# Altium PCB PCB1.PcbDoc
Units mm, origin at the board's own origin, x right, y up, seen from the top; angles counter-clockwise.
Board outline 42.5 x 36 mm, 4 copper layers (Top Layer, Int1 (GND), Int2 (PWR), Bottom Layer), stack 1.333 mm thick; 37 components, 21 nets, 116 pads, 31 vias.
Unrouted connection lines stored in the file: 32.
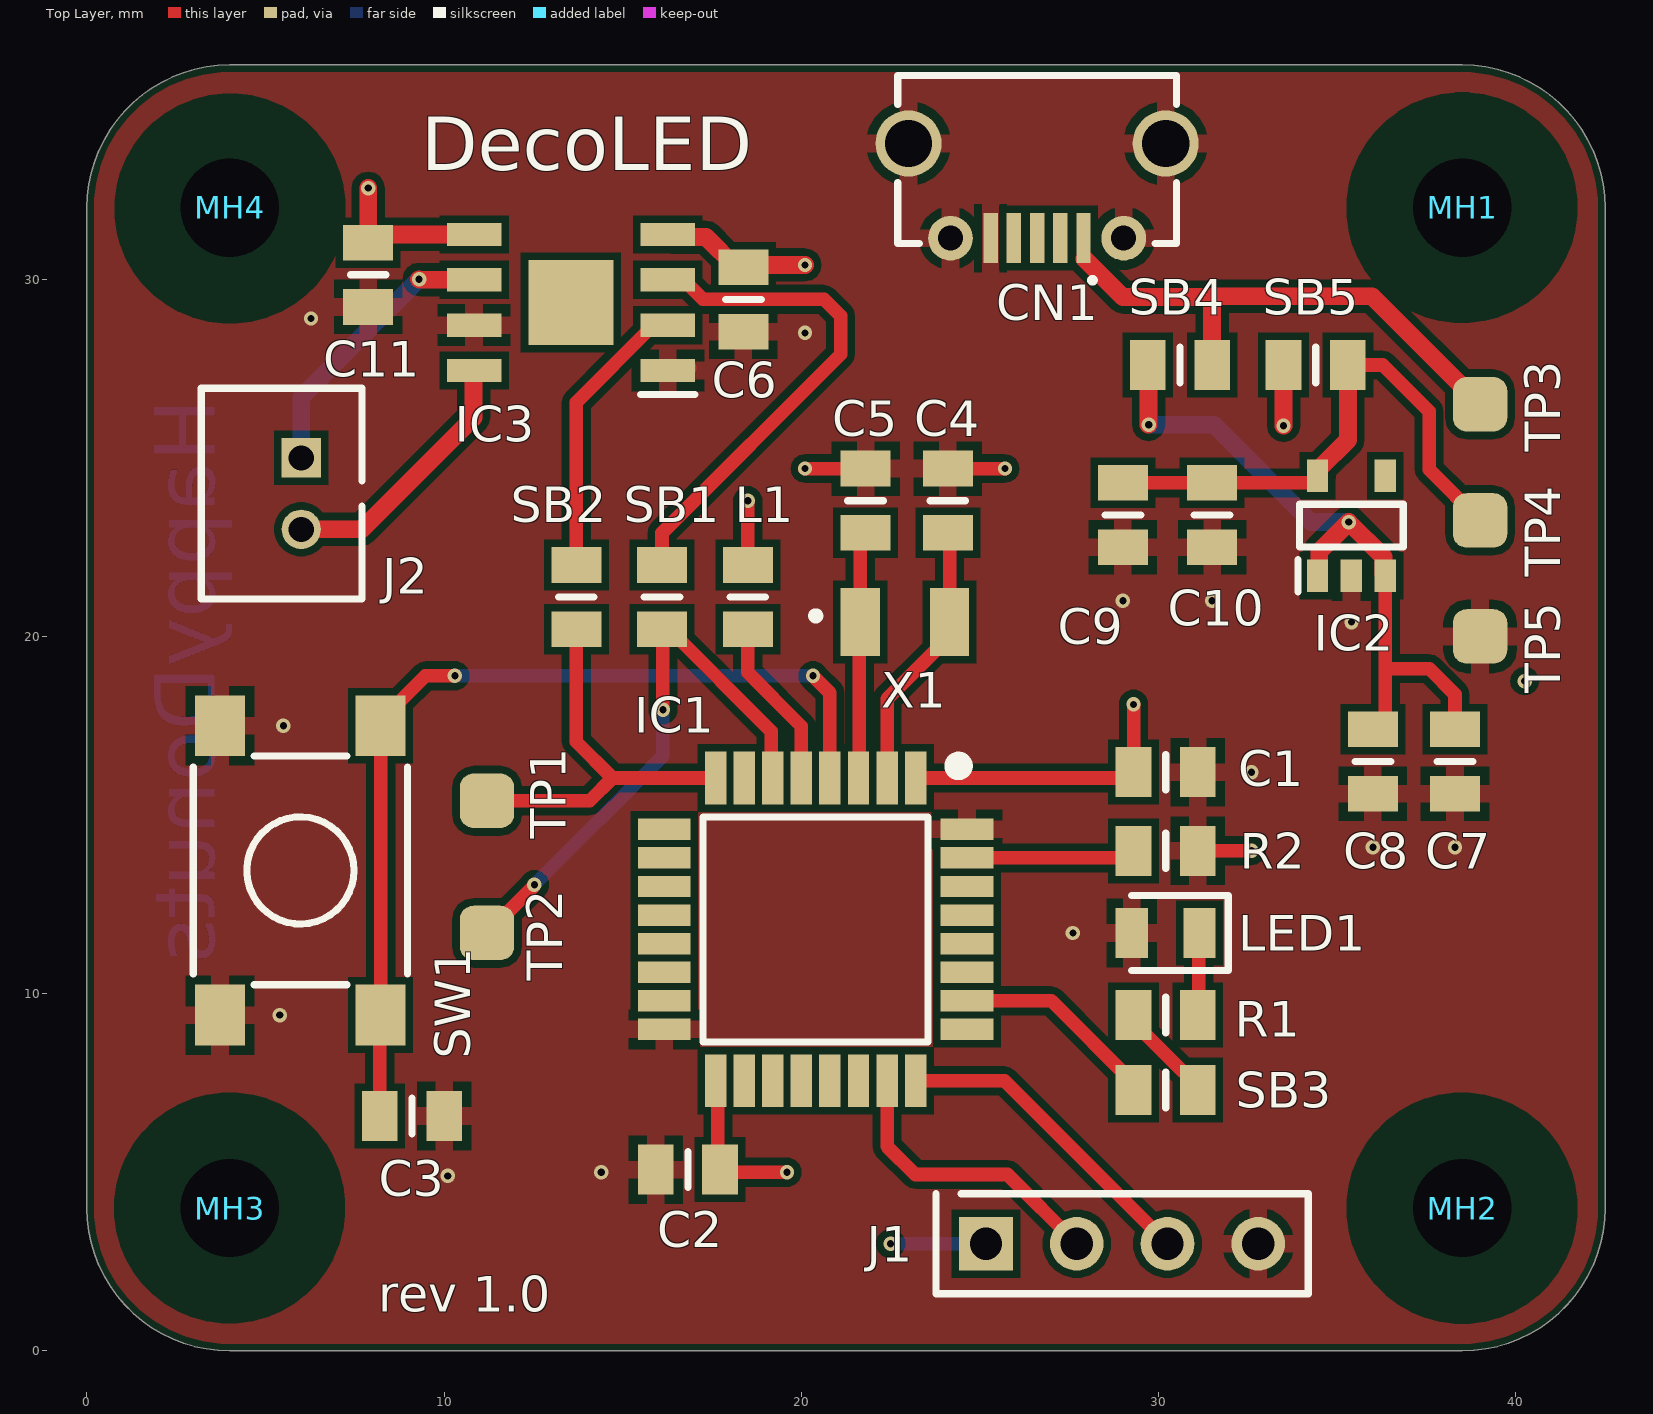
[diagram p0: Top Layer view]
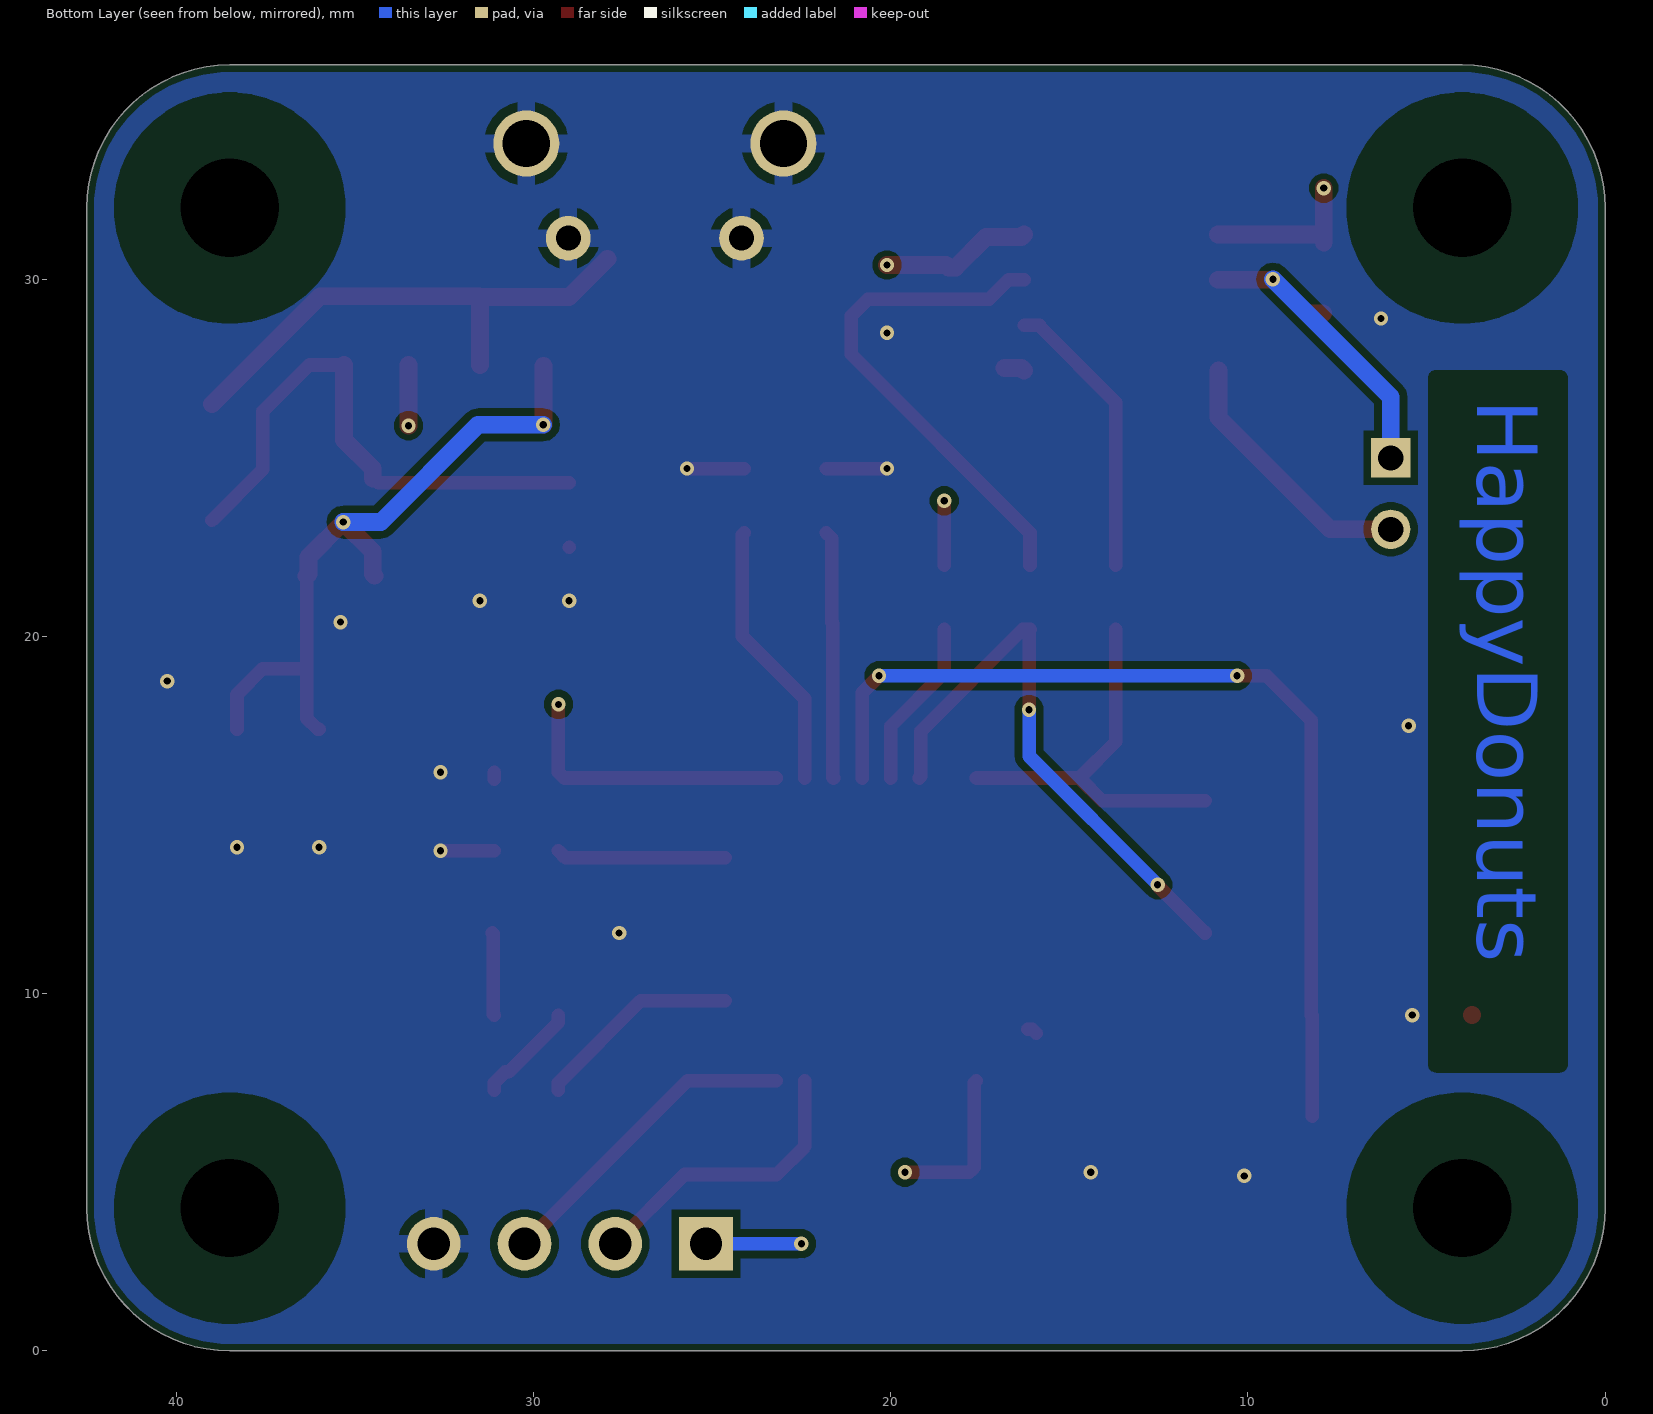
[diagram p1: Bottom Layer view, seen from below]
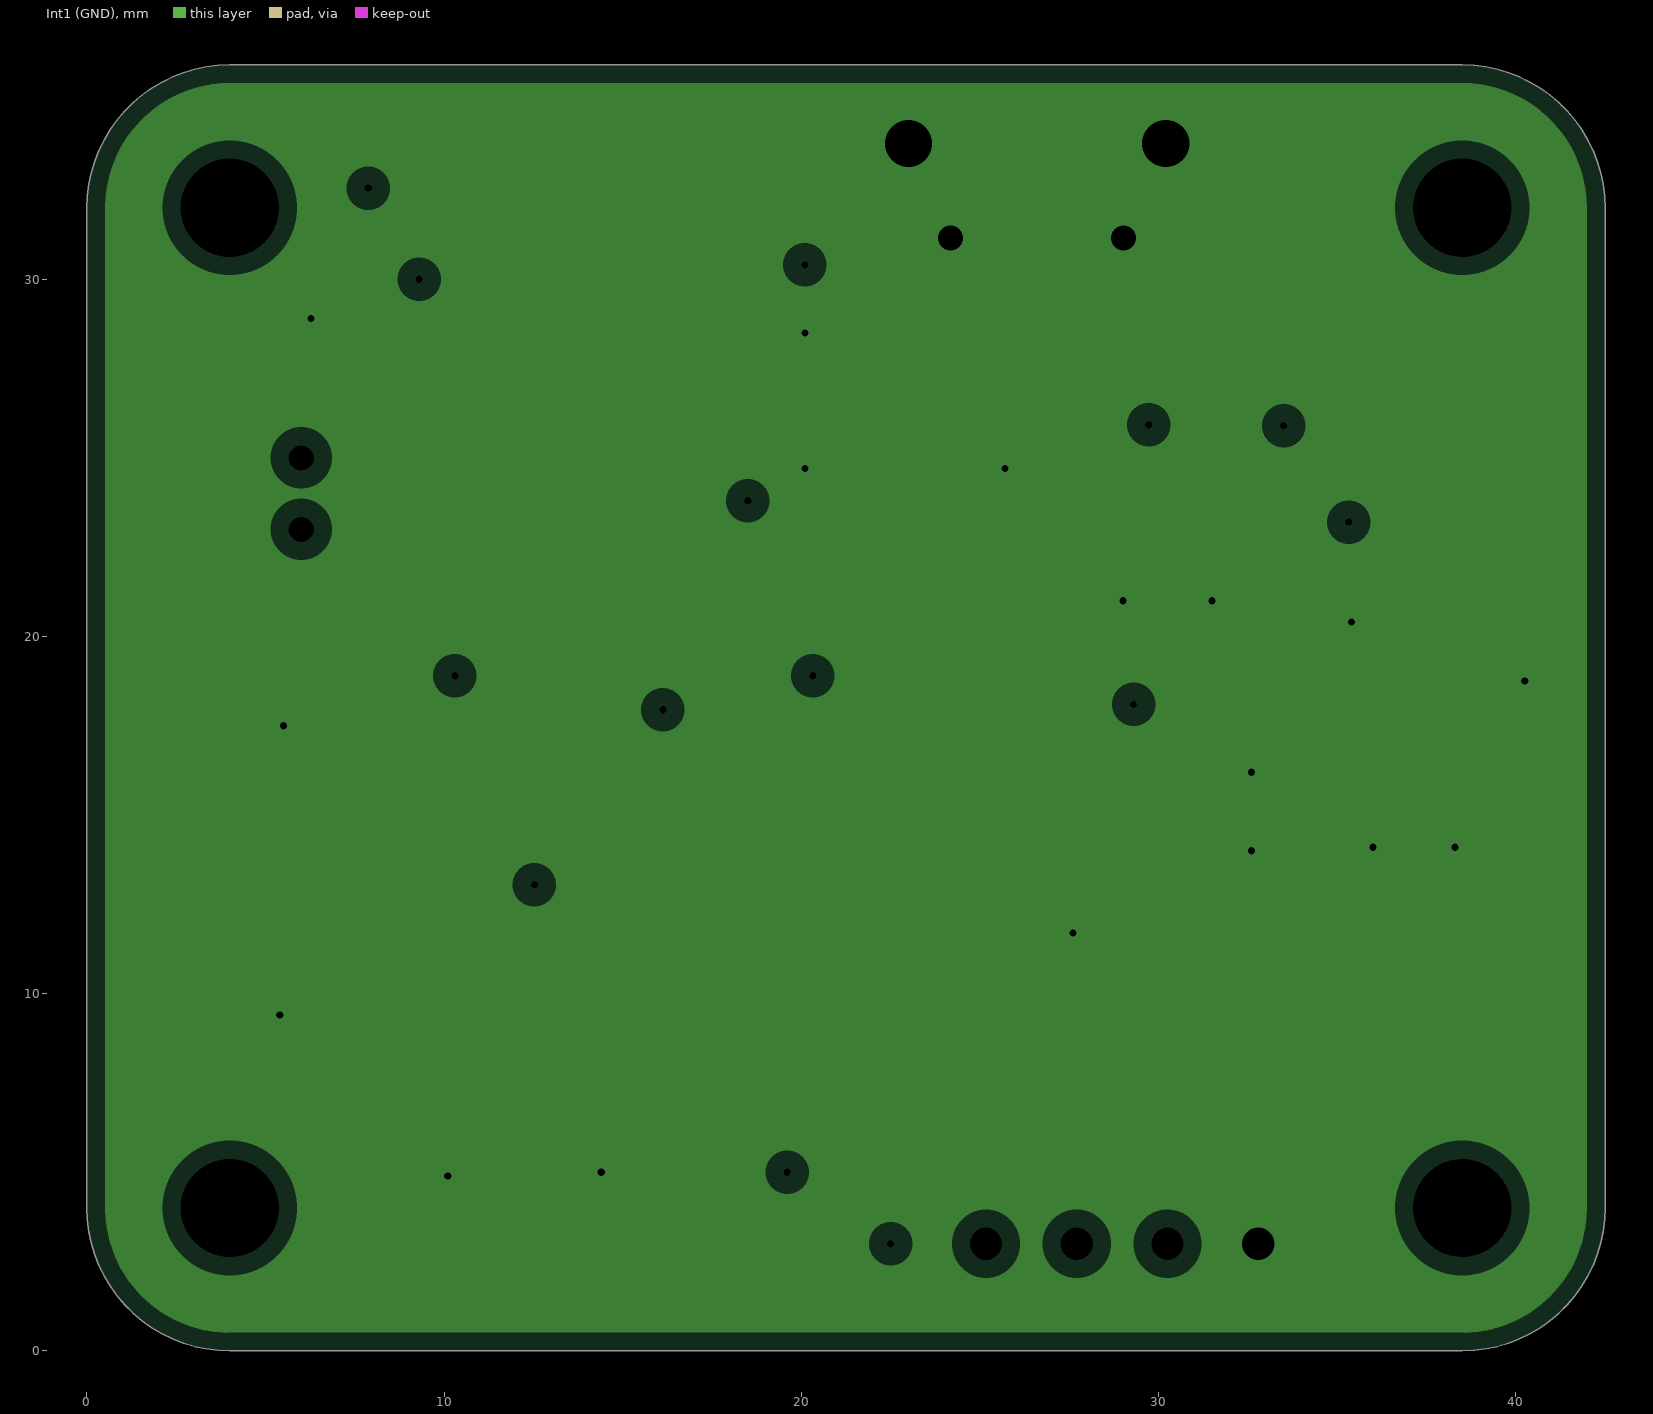
[diagram p2: Int1 (GND), clearances drawn from the general rule]
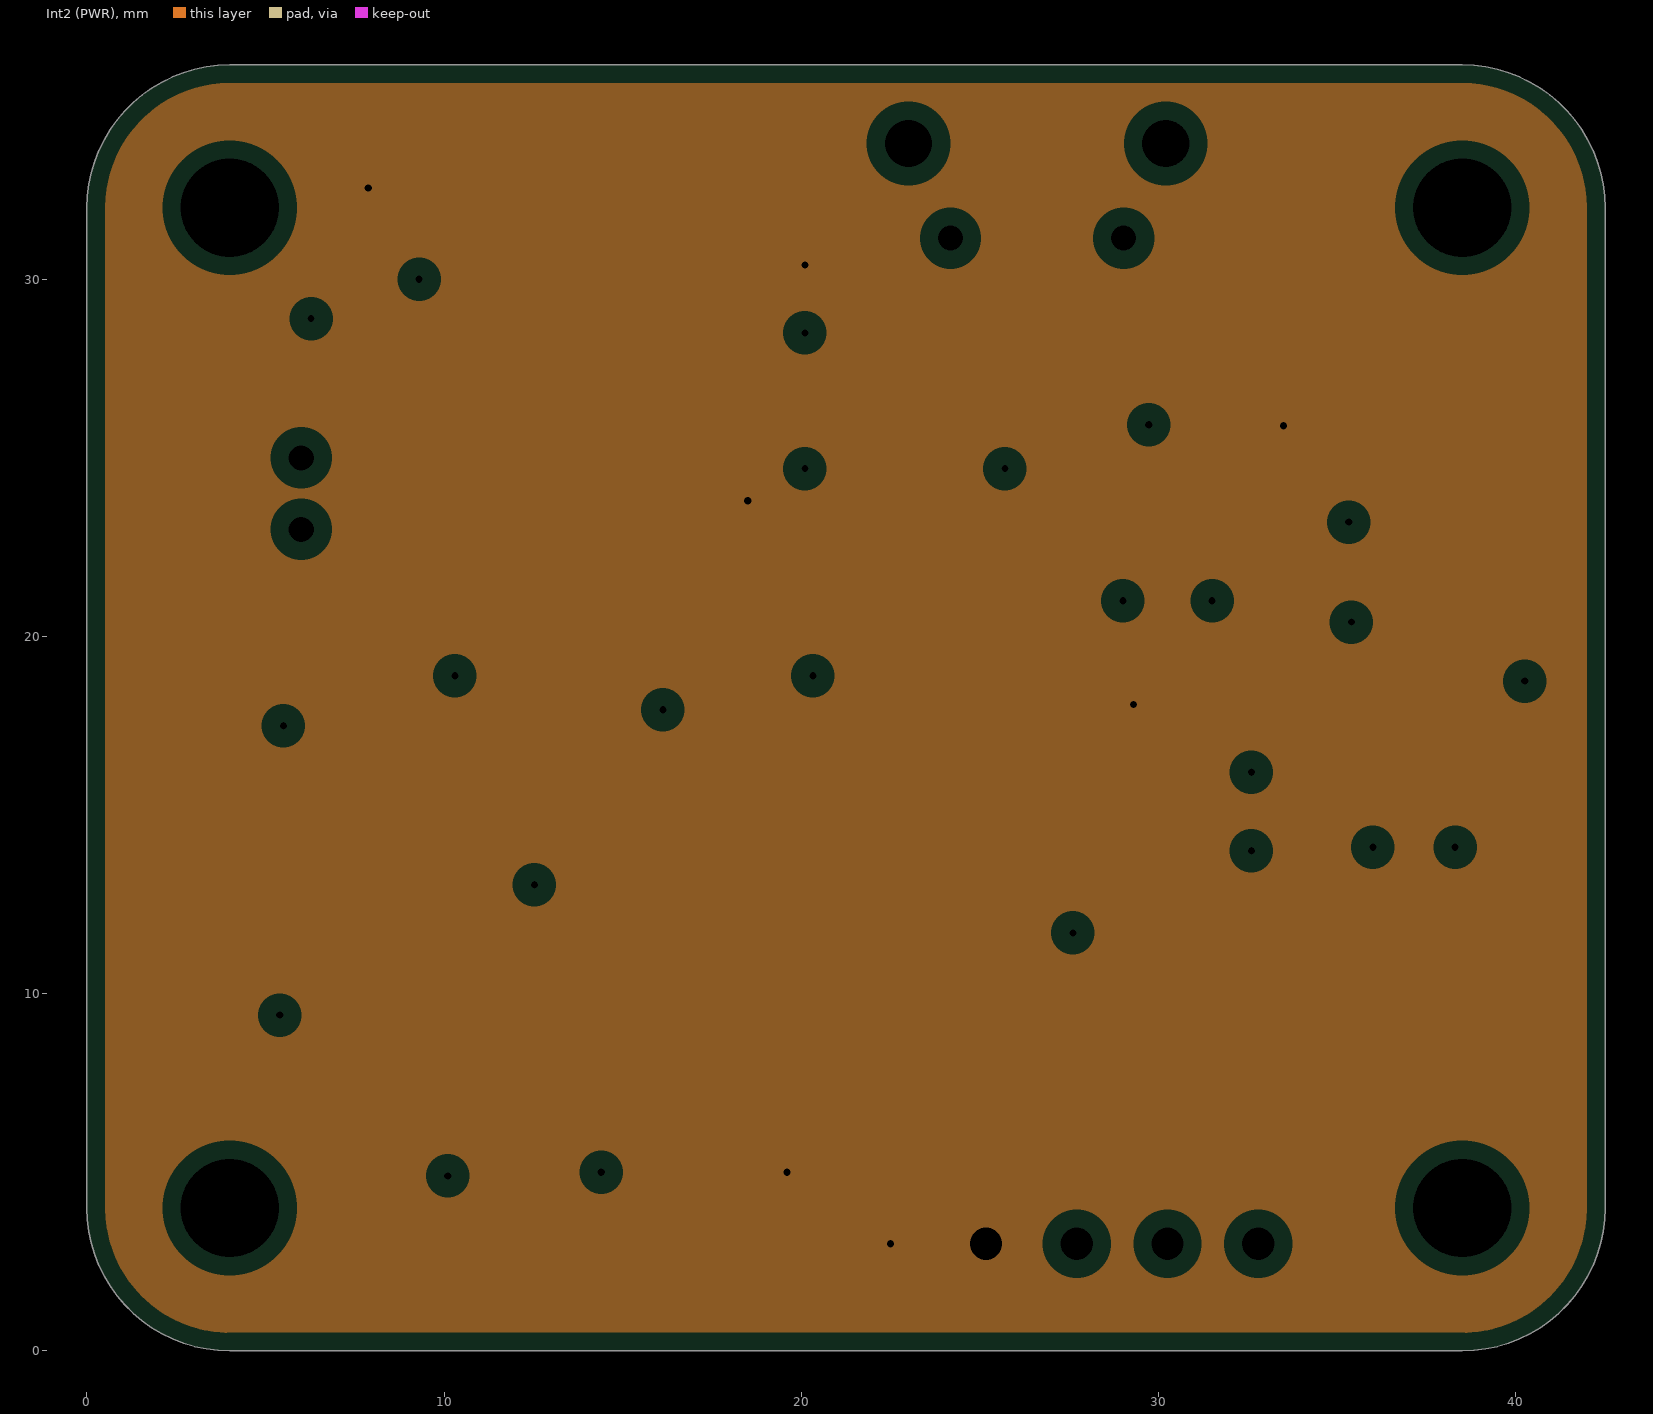
[diagram p3: Int2 (PWR), clearances drawn from the general rule]

## Layer stack, top to bottom
Top Solder: solder mask 0.0254, SM-001, Dk 4
Top Layer: signal copper 0.035
Dielectric 1: prepreg 0.1295, PP-017, Dk 4.3
Dielectric 2: prepreg 0.1295, PP-017, Dk 4.3
Int1 (GND): plane copper 0.017, net GND
Dielectric 3: core 0.7112, Core-039, Dk 4.8
Int2 (PWR): plane copper 0.017, net 3V3
Dielectric 4: prepreg 0.1295, PP-017, Dk 4.3
Dielectric 5: prepreg 0.1295, PP-017, Dk 4.3
Bottom Layer: signal copper 0.035
Bottom Solder: solder mask 0.0254, SM-001, Dk 4

## Board outline
4,0 cw(c4,4) 0,4 0,32 cw(c4,32) 4,36 38.5,36 cw(c38.5,32) 42.5,32 42.5,4 cw(c38.5,4) 38.5,0

## Design rules (kind name [scope] priority, off if disabled: settings)
BoardOutlineClearance [All] p1: gap=0.2 ignorepadtopadclearanceinfootprint=FALSE except(0.4: Arc-SplitBarrior Arc-SplitContinuation Track-SplitBarrior Track-SplitContinuation SMDPad-SplitBarrior SMDPad-SplitContinuation THPad-SplitBarrior THPad-SplitContinuation Via-SplitBarrior Via-SplitContinuation Fill-SplitBarrior Fill-SplitContinuation Poly-SplitBarrior Poly-SplitContinuation Region-SplitBarrior Region-SplitContinuation Text-SplitBarrior Text-SplitContinuation)
Clearance "Clearance Bottom Layer" [OnLayer('Bottom Layer')] p1: gap=0.203 ignorepadtopadclearanceinfootprint=TRUE except(0.254: Arc-Text Track-Text SMDPad-Text THPad-Text Via-Text Fill-Text Poly-Text Region-Text Text-Text)
Clearance "Clearance Top Layer" [OnLayer('Top Layer')] p2: gap=0.203 ignorepadtopadclearanceinfootprint=TRUE except(0.254: Arc-Text Track-Text SMDPad-Text THPad-Text Via-Text Fill-Text Poly-Text Region-Text Text-Text)
Clearance [All] p3: gap=0.2 ignorepadtopadclearanceinfootprint=FALSE except(0.089: Arc-Arc Arc-Track Arc-SMDPad Track-Track Track-SMDPad SMDPad-SMDPad; 0.127: Arc-Via Track-Via SMDPad-Via THPad-Via Via-Via; 0.254: Arc-Text Track-Text SMDPad-Text THPad-Text Via-Text Fill-Text Poly-Text Region-Text Text-Text)
HoleSize [All] p1: absolutevalues=TRUE maxlimit=6.3 minlimit=0.2 maxpercent=80.000 minpercent=20.000
MinimumAnnularRing [All] p1: minimumring=0.076
MinimumSolderMaskSliver [All] p1: minsoldermaskwidth=0.1
PlaneClearance [All] p1: clearance=0.508
PlaneConnect [All] p1: planeconnectstyle=Direct reliefexpansion=0.508 reliefentries=4 reliefconductorwidth=0.254 reliefairgap=0.254
PolygonConnect PolygonConnect_1 [All] p1: thpad.connectstyle=Relief thpad.reliefconductorwidth=0.508 thpad.reliefentries=4 thpad.polygonreliefangle="90 Angle" thpad.airgapwidth=0.254 smdpad.connectstyle=Relief smdpad.reliefconductorwidth=0.508 smdpad.reliefentries=4 smdpad.polygonreliefangle="90 Angle" smdpad.airgapwidth=0.254 via.connectstyle=Direct via.reliefconductorwidth=0.508 via.reliefentries=4 via.polygonreliefangle="90 Angle" via.airgapwidth=0.254
RoutingCorners [All] p1: cornerstyle=Round minsetback=2.54 maxsetback=2.54
RoutingVias [All] p1: holewidth=0.2 width=0.4 viastyle="Through Hole" minholewidth=0.2 minwidth=0.4 maxholewidth=0.2 maxwidth=2
SilkToSilkClearance [All] p1: silktosilkclearance=0.1
SilkToSolderMaskClearance [IsPad] p1: minsilkscreentomaskgap=0.1 clearancetoexposedcopper=TRUE
SolderMaskExpansion [All] p1: expansion=0.102 istentingtop=FALSE
Width [All] p1: maxlimit=2.54 minlimit=0.089 preferedwidth=0.381
23 further rules are at their usual default settings.

## Classes and differential pairs
component class main: C1 C2 C3 C4 C5 C6 C7 C8 C9 C10 C11 CN1 IC1 IC2 IC3 J1 J2 L1 LED1 MH1 MH2 R1 R2 SB1 SB2 SB3 SB4 SB5 SW1 TP1 TP2 TP3 TP4 TP5 X1

## Components (designator, comment, footprint, x,y, rotation, side; value= is the part's Value field where it differs from the comment)
C1 "C0805C104K5RAC7411" CAPC2012X94N 30.2,16.2 r180 top value=100nF
C2 "C0805C104K5RAC7411" CAPC2012X94N 16.825,5.075 r0 top value=100nF
C3 "C0805C104K5RAC7411" CAPC2012X94N 9.1,6.575 r0 top value=100nF
C4 "08055A4R3CAT2A" CAPC2012X94N 24.1,23.8 r270 top value=4.3pF
C5 "08055A4R3CAT2A" CAPC2012X94N 21.8,23.8 r270 top value=4.3pF
C6 "C0805C104K5RAC7411" CAPC2012X94N 18.377,29.434 r90 top value=100nF
C7 "C0805C104K5RAC7411" CAPC2012X94N 38.3,16.5 r90 top value=100nF
C8 "885012107015" CAPC2012X135N 36,16.5 r90 top value=1uF
C9 "885012107015" CAPC2012X135N 29,23.4 r90 top value=1uF
C10 "C0805C104K5RAC7411" CAPC2012X94N 31.5,23.4 r90 top value=100nF
C11 "C0805C104K5RAC7411" CAPC2012X94N 7.875,30.125 r90 top value=100nF
CN1 "920-E52A2021S10100" USB307530A 26.6,33.8 r180 top
IC1 "STM32L031K6T6" QFP80P900X900X160-32N 20.4,11.8 r270 top
IC2 "BU33SD5WG-TR" SOT95P280X125-5N 35.4,23.1 r90 top
IC3 "TB67H450FNG,EL" SOIC127P600X175-9N 13.55,29.35 r180 top
J1 "4PIN" 4PIN 25.17,3 r0 top
J2 "B2B-PH-K-S_LF__SN_" SHDR2W50P0X200_1X2_590X450X600P 6,25 r90 top
L1 "742792030" RESC2012X60N 18.5,21.1 r90 top
LED1 "APT2012LZGCK" LEDC2012X85N 30.2,11.7 r180 top
MH1 "MOUNTING_HOLE_NP" MOUNTING_HOLE_NP 38.5,32 r0 top
MH2 "MOUNTING_HOLE_NP" MOUNTING_HOLE_NP 38.5,4 r0 top
MH3 "MOUNTING_HOLE_NP" MOUNTING_HOLE_NP 4,4 r0 top
MH4 "MOUNTING_HOLE_NP" MOUNTING_HOLE_NP 4,32 r0 top
R1 "RC0805FR-071K8L" RESC2012X60N 30.2,9.4 r0 top value=1.8k
R2 "RC0805FR-0710KL" RESC2012X60N 30.2,14 r180 top value=10k
SB1 "RC0805FR-070RL" RESC2012X60N 16.1,21.1 r270 top
SB2 "RC0805FR-070RL" RESC2012X60N 13.7,21.1 r270 top
SB3 "RC0805FR-070RL" RESC2012X60N 30.2,7.3 r0 top
SB4 "RC0805FR-070RL" RESC2012X60N 30.6,27.6 r180 top
SB5 "RC0805FR-070RL" RESC2012X60N 34.4,27.6 r180 top
SW1 "EVP-BT3G4A000" EVP-BT3G4A000 5.975,13.45 r270 top
TP1 "TEST_POINT" TEST_POINT 11.2,15.4 r0 top
TP2 "TEST_POINT" TEST_POINT 11.2,11.7 r90 top
TP3 "TEST_POINT" TEST_POINT 39,26.5 r90 top
TP4 "TEST_POINT" TEST_POINT 39,23.25 r90 top
TP5 "TEST_POINT" TEST_POINT 39,20 r90 top
X1 "ABS07-32.768KHZ-9-T" ABS-07 22.9,20.4 r0 top

## Footprints (in the part's own frame and the unit in brackets; to place one, negate y for a bottom-side part, rotate by r counter-clockwise, add the part's x,y. Pads: shape width x height; smd on the part's side, far side on the other; paste and mask are expansions set on the pad)
4PIN [mm] "Connector; Edge; 22 Position"
  rect 1.5x1.5 hole 0.9: 1(0,0)
  round 1.5 hole 0.9: 2(2.54,0) 3(5.08,0) 4(7.62,0)
  silkscreen extent -1.4,-1.4 9.02,1.4, body extent -1.28,-1.27 8.88,1.27, height 9.2
ABS-07 [mm]
  rect 1.1x1.9 smd: 1(-1.25,0) 2(1.25,0)
  silkscreen extent -2.58,0.09 -2.41,0.26, body extent -1.6,-0.75 1.6,0.75, height 0.9
CAPC2012X94N [mm]
  rect 1x1.4 smd: 1(-0.9,0) 2(0.9,0)
  silkscreen extent 0,-0.5 0,0.5, body extent -1,-0.63 1,0.63, height 0.94
CAPC2012X135N [mm]
  rect 1x1.4 smd: 1(-0.9,0) 2(0.9,0)
  silkscreen extent 0,-0.5 0,0.5, body extent -1,-0.63 1,0.63, height 1.35
EVP-BT3G4A000 [mm]
  rect 1.7x1.4 smd: 1(-4.05,2.25) 2(4.05,2.25) 3(4.05,-2.25) 4(-4.05,-2.25)
  silkscreen extent -3.2,-3 3.2,3, body extent -3.2,-3 3.2,3, height 4.3
LEDC2012X85N [mm]
  rect 0.9x1.4 smd: 1(-0.95,0) 2(0.95,0)
  silkscreen extent -1.75,-1.05 0.95,1.05, body extent -1,-0.63 1,0.63, height 1.1
MOUNTING_HOLE_NP [mil]
  round 60 hole 108.27 unplated mask+86.61: 5(0,0)
QFP80P900X900X160-32N [mm]
  rect 1.475x0.6 smd: 1(-4.238,2.8) 2(-4.238,2) 3(-4.238,1.2) 4(-4.238,0.4) 5(-4.238,-0.4) 6(-4.238,-1.2) 7(-4.238,-2) 8(-4.238,-2.8) 17(4.238,-2.8) 18(4.238,-2) 19(4.238,-1.2) 20(4.238,-0.4) 21(4.238,0.4) 22(4.238,1.2) 23(4.238,2) 24(4.238,2.8)
  rect 0.6x1.475 smd: 9(-2.8,-4.238) 10(-2,-4.238) 11(-1.2,-4.238) 12(-0.4,-4.238) 13(0.4,-4.238) 14(1.2,-4.238) 15(2,-4.238) 16(2.8,-4.238) 25(2.8,4.238) 26(2,4.238) 27(1.2,4.238) 28(0.4,4.238) 29(-0.4,4.238) 30(-1.2,4.238) 31(-2,4.238) 32(-2.8,4.238)
  silkscreen extent -4.77,-3.15 3.15,4.2, body extent -4.5,-4.5 4.5,4.5, height 1.6
RESC2012X60N [mm]
  rect 1x1.4 smd: 1(-0.9,0) 2(0.9,0)
  silkscreen extent 0,-0.5 0,0.5, body extent -1,-0.63 1,0.63, height 0.6
SHDR2W50P0X200_1X2_590X450X600P [mm]
  rect 1.1x1.1 hole 0.7: 1(0,0)
  round 1.1 hole 0.7: 2(-2,0)
  silkscreen extent -3.95,-1.7 1.95,2.8, body extent -3.95,-1.7 1.95,2.8, height 6
SOIC127P600X175-9N [mm]
  rect 1.525x0.65 smd: 1(-2.712,1.905) 2(-2.712,0.635) 3(-2.712,-0.635) 4(-2.712,-1.905) 5(2.712,-1.905) 6(2.712,-0.635) 7(2.712,0.635) 8(2.712,1.905)
  rect 2.39x2.39 smd: 9(0,0)
  silkscreen extent -3.47,2.58 -1.95,2.58, body extent -3,-2.45 3,2.45, height 1.75
SOT95P280X125-5N [mm]
  rect 0.9x0.6 smd: 1(-1.4,0.95) 2(-1.4,0) 3(-1.4,-0.95) 4(1.4,-0.95) 5(1.4,0.95)
  silkscreen extent -1.85,-1.45 0.6,1.5, body extent -1.4,-1.45 1.4,1.45, height 1.25
TEST_POINT [mil] "Test point"
  rrect50% 60x60 smd: TP(0,0)
USB307530A [mm]
  rect 0.4x1.4 smd: 1(-1.3,2.65) 2(-0.65,2.65) 3(0,2.65) 4(0.65,2.65) 5(1.3,2.65)
  round 1.25 hole 0.7: 6(2.425,2.65) 9(-2.425,2.65)
  round 1.85 hole 1.328: 7(3.6,0) 8(-3.6,0)
  silkscreen extent -3.9,-1.9 3.9,3.87, body extent -3.9,-2.77 3.9,2.77, height 2.49

## Part data
C1 C2 C3 C6 C7 C10 C11: "Capacitor", Manufacturer_Name=Kemet, Mouser Part Number=80-C0805C104K5RACLR, Arrow Part Number=C0805C104K5RAC7411, Arrow Price/Stock=https://www.arrow.com/en/products/c0805c104k5rac7411/kemet-corporation, Datasheet Link=https://www.mouser.com/datasheet/2/212/KEM_C1002_X7R_SMD-1102033.pdf, Height=0.88mm, Manufacturer_Part_Number=C0805C104K5RAC7411, Mouser Price/Stock=https://www.mouser.co.uk/ProductDetail/KEMET/C0805C104K5RAC7411?qs=jbRM9o5BbzPcVXF0wW9AYg%3D%3D
C4 C5: "Capacitor", Manufacturer_Name=AVX, Datasheet Link=http://datasheets.avx.com/C0GNP0-Dielectric.pdf, Height=0.94mm, Manufacturer_Part_Number=08055A4R3CAT2A
C8 C9: "Capacitor", Manufacturer_Name="Wurth Elektronik", Mouser Part Number=710-885012107015, Datasheet Link=https://katalog.we-online.com/pbs/datasheet/885012107015.pdf, Height=1.35mm, Manufacturer_Part_Number=885012107015, Mouser Price/Stock=https://www.mouser.co.uk/ProductDetail/Wurth-Elektronik/885012107015?qs=0KOYDY2FL2%252BNQREZP%252BtVoQ%3D%3D
CN1: "USB connector", Arrow Part Number=TB67H450FNG,EL, Manufacturer_Name="Jing Extension of the Electronic Co.", Arrow Price/Stock=https://www.arrow.com/en/products/tb67h450fngel/toshiba?region=nac, Datasheet Link=http://toshiba.semicon-storage.com/info/docget.jsp?did=65346&prodName=TB67H450FNG, Height=1.9mm, Manufacturer_Part_Number=https://datasheet.lcsc.com/lcsc/2103051832_Jing-Extension-of-the-Electronic-Co--920-E52A2021S10100_C10418.pdf, Mouser Part Number=920-E52A2021S10100, Mouser Price/Stock=https://www.mouser.co.uk/ProductDetail/Toshiba/TB67H450FNGEL?qs=h6V4JsTaLXeReNg2bp0jug%3D%3D
IC1: "Integrated Circuit", Manufacturer_Name=STMicroelectronics, Mouser Part Number=511-STM32L031K6T6, Arrow Part Number=STM32L031K6T6, Arrow Price/Stock=https://www.arrow.com/en/products/stm32l031k6t6/stmicroelectronics?region=nac, Datasheet Link=https://www.st.com/resource/en/datasheet/stm32l031k6.pdf, Height=1.6mm, Manufacturer_Part_Number=STM32L031K6T6, Mouser Price/Stock=https://www.mouser.co.uk/ProductDetail/STMicroelectronics/STM32L031K6T6?qs=mwoc%252BQmZlGIAMyWzQ3GanA%3D%3D
IC2: "Power Supply", Manufacturer_Name="ROHM Semiconductor", Mouser Part Number=755-BU33SD5WG-TR, Datasheet Link=https://componentsearchengine.com/Datasheets/1/BU33SD5WG-TR.pdf, Height=1.25mm, Manufacturer_Part_Number=BU33SD5WG-TR, Mouser Price/Stock=https://www.mouser.co.uk/ProductDetail/ROHM-Semiconductor/BU33SD5WG-TR?qs=%2FKR40Cd6GUrQDzRkUEt69Q%3D%3D
IC3: "Integrated Circuit", Manufacturer_Name=Toshiba, Mouser Part Number=757-TB67H450FNGEL, Arrow Part Number=TB67H450FNG,EL, Arrow Price/Stock=https://www.arrow.com/en/products/tb67h450fngel/toshiba?region=nac, Datasheet Link=http://toshiba.semicon-storage.com/info/docget.jsp?did=65346&prodName=TB67H450FNG, Height=1.75mm, Manufacturer_Part_Number=TB67H450FNG,EL, Mouser Price/Stock=https://www.mouser.co.uk/ProductDetail/Toshiba/TB67H450FNGEL?qs=h6V4JsTaLXeReNg2bp0jug%3D%3D
J1: "Connector"
J2: "Connector", Arrow Part Number=B2B-PH-K-S(LF)(SN), Manufacturer_Name="JST (JAPAN SOLDERLESS TERMINALS)", Arrow Price/Stock=https://www.arrow.com/en/products/b2b-ph-k-s-lf-sn/jst-manufacturing, Datasheet Link=https://datasheet.lcsc.com/szlcsc/JST-Sales-America-B2B-PH-K-S-LF-SN_C131337.pdf, Height=6mm, Manufacturer_Part_Number=B2B-PH-K-S(LF)(SN)
L1: "Inductor", Manufacturer_Name="Wurth Elektronik", Datasheet Link=https://www.mouser.fr/datasheet/2/445/742792030-2449195.pdf, Height=0.6mm, Manufacturer_Part_Number=742792030
LED1: "LED", Manufacturer_Name=Kingbright, Mouser Part Number=604-APT2012LZGCK, Arrow Part Number=APT2012LZGCK, Arrow Price/Stock=https://www.arrow.com/en/products/apt2012lzgck/kingbright, Datasheet Link=http://www.kingbrightusa.com/images/catalog/SPEC/APT2012LZGCK.pdf, Height=0.85mm, Manufacturer_Part_Number=APT2012LZGCK, Mouser Price/Stock=https://www.mouser.co.uk/ProductDetail/Kingbright/APT2012LZGCK?qs=6oMev5NRZMHOosFiXb%2F3qw%3D%3D
MH1 MH2 MH3 MH4: "Mounting hole"
R1: "Resistor", Manufacturer_Name="YAGEO (PHYCOMP)", Mouser Part Number=603-RC0805FR-071K8L, Datasheet Link=https://datasheet.datasheetarchive.com/originals/distributors/Datasheets_SAMA/902f9e387b938f871d31120f5fc1d65e.pdf, Height=0.6mm, Manufacturer_Part_Number=RC0805FR-071K8L, Mouser Price/Stock=https://www.mouser.co.uk/ProductDetail/Yageo/RC0805FR-071K8L/?qs=BrN8wpjQTgHgSGvPYmemsg%3D%3D
R2: "Resistor", Manufacturer_Name="YAGEO (PHYCOMP)", Mouser Part Number=603-RC0805FR-0710KL, Arrow Part Number=RC0805FR-0710KL, Arrow Price/Stock=https://www.arrow.com/en/products/rc0805fr-0710kl/yageo?region=europe, Datasheet Link=https://datasheet.datasheetarchive.com/originals/distributors/Datasheets_SAMA/902f9e387b938f871d31120f5fc1d65e.pdf, Height=0.6mm, Manufacturer_Part_Number=RC0805FR-0710KL, Mouser Price/Stock=https://www.mouser.co.uk/ProductDetail/YAGEO/RC0805FR-0710KL?qs=7bY8808IzHq6vrU3BeiiYw%3D%3D
SB1 SB2 SB3 SB4 SB5: "Jumper (0 ohm)", Manufacturer_Name="YAGEO (PHYCOMP)", Mouser Part Number=603-RC0805FR-070RL, Datasheet Link=https://datasheet.datasheetarchive.com/originals/distributors/Datasheets_SAMA/902f9e387b938f871d31120f5fc1d65e.pdf, Height=0.6mm, Manufacturer_Part_Number=RC0805FR-070RL, Mouser Price/Stock=https://www.mouser.co.uk/ProductDetail/YAGEO/RC0805FR-070RL?qs=fRxXYNj8ftF6kXqh1XbZJQ%3D%3D
SW1: "Tactile switch", Manufacturer_Name=Panasonic, Datasheet Link=https://www.mouser.fr/datasheet/2/315/sw_lt_eng_6s_th-2889044.pdf, Height=3.1mm, Manufacturer_Part_Number=EVP-BT3G4A000
TP1 TP2 TP3 TP4 TP5: "Test point"
X1: "Crystal", Manufacturer_Name=ABRACON, Mouser Part Number=815-ABS07-32.768K9T, Arrow Part Number=ABS07-32.768KHZ-9-T, Arrow Price/Stock=https://www.arrow.com/en/products/abs07-32.768khz-9-t/abracon?region=nac, Datasheet Link=http://www.abracon.com/Resonators/ABS07.pdf, Manufacturer_Part_Number=ABS07-32.768KHZ-9-T, Mouser Price/Stock=https://www.mouser.co.uk/ProductDetail/ABRACON/ABS07-32768KHZ-9-T?qs=2nyfZ6BV3ogTQgR0mYqaug%3D%3D

## Via types
v1: diameter 0.4, hole 0.2, Top Layer to Bottom Layer, 31 vias

## Nets (pads, with @x,y where several pads share a name; then routed paths per layer and width w, separated by ;. In a path a pad name is that pad's centre, name@x,y a point inside that pad or via, vN(x,y) a via of type N, cw(c..) or ccw(c..) an arc to the next point about the centre after c; other vN are vias at no path point)
3V3: C1.2 C2.2 C6.2 C11.2 IC1.1 IC1.17 IC3.4 IC3.5 J1.1 L1.2 SB5.2 | length 27.4
  Top Layer w0.381: IC1.17 17.663,7.499 17.663,5.137 C2.2 17.8,5 v1(19.6,5) ; L1.2 v1(18.5,23.8) ; IC1.1 29.138,16.038 C1.2 v1(29.3,18.1)
  Top Layer w0.5: C11.2 v1(7.875,32.55) ; C11.2@7.875,31.255 IC3.5 ; IC3.4 16.337,31.18 17.331,31.18 18.177,30.334 C6.2 18.443,30.4 v1(20.1,30.4) ; v1(33.5,25.9) SB5.2
  Bottom Layer w0.381: v1(22.5,3) J1.1
GND: C1.1 C2.1 C3.2 C4.1 C5.1 C6.1 C7.1 C8.1 C9.1 C10.1 C11.1 CN1.5 CN1.6 CN1.7 CN1.8 CN1.9 IC1.16 IC1.32 IC2.2 IC3.1 IC3.7 J1.4 LED1.2 R2.1 SW1.3 SW1.4 TP5.TP | length 6.2
  Top Layer w0.381: IC1.16@15.925,8.891 16.034,9 IC1.16 ; v1(20.1,24.7) C5.1 ; C4.1 v1(25.7,24.7) ; R2.1 v1(32.6,14) ; C1.1@31.1,16 C1.1 ; J1.4 J1.4@32.796,3.006
  Top Layer w0.5: C11.1@7.9,29.05 C11.1@8.25,29.05 ; IC3.1 16.337,27.52 IC3.1@16.813,27.52
  other v1: 10.1,4.9 14.4,5 5.4,9.4 27.6,11.7 36,14.1 38.3,14.1 32.6,16.2 5.5,17.5 40.25,18.75 35.4,20.4 29,21 31.5,21 20.1,28.5 6.275,28.9
NetC3_1: C3.1 IC1.4 SW1.1 SW1.2 | length 26.8
  Top Layer w0.381: C3.1 8.2,9.375 SW1.2 SW1.1 8.225,17.65 9.475,18.9 v1(10.3,18.9) ; v1(20.325,18.9) 20.325,18.895 20.8,18.42 IC1.4
  Bottom Layer w0.381: v1(10.3,18.9) v1(20.325,18.9)
NetC4_2: C4.2 IC1.2 X1.2 | length 7.6
  Top Layer w0.381: IC1.2 22.4,18.25 24.15,20 X1.2 24.15,22.85 C4.2
NetC5_2: C5.2 IC1.3 X1.1 | length 6.9
  Top Layer w0.381: IC1.3 21.625,16.063 21.625,20.375 X1.1 21.65,22.75 C5.2
NetC7_2: C7.2 C8.2 IC2.1 IC2.3 SB4.2 | length 19.9
  Top Layer w0.381: SB4.2 SB4.2@29.721,27.579 ; v1@29.721,25.929 v1(29.725,25.925) ; C8.2 36.04,17.4 36.35,17.709 36.35,19.125 ; IC2.3 36.35,19.125 ; C7.2 38.3,18.375 37.575,19.1 36.375,19.1 36.35,19.125
  Top Layer w0.5: v1@29.721,25.929 SB4.2@29.721,27.579 ; IC2.1 34.5,21.75 34.5,22.375 v1@35.3,23.175 ; v1(35.325,23.2) 36.3,22.225 36.3,21.75 IC2.3
  Bottom Layer w0.5: v1(29.725,25.925) 31.55,25.925 34.275,23.2 v1(35.325,23.2)
NetC9_2: C9.2 C10.2 IC2.5 SB5.1 TP4.TP | length 15.5
  Top Layer w0.381: C9.2 C10.2 34.341,24.3 34.45,24.41 IC2.5 ; SB5.1 36.275,27.6 37.575,26.3 37.575,24.675 TP4.TP
  Top Layer w0.5: IC2.5@34.5,24.425 34.5,24.7 35.3,25.5 SB5.1
NetCN1_1: CN1.1 SB4.1 TP3.TP | length 14.7
  Top Layer w0.381: 31.5,29.5 31.525,29.525
  Top Layer w0.5: CN1.1@27.925,30.575 29,29.5 31.5,29.5 SB4.1 ; 31.525,29.525 35.975,29.525 TP3.TP
NetIC1_5: IC1.5 L1.1 | length 4.8
  Top Layer w0.381: L1.1 18.5,18.988 20,17.488 IC1.5
NetIC1_6: IC1.6 SB1.2 TP2.TP | length 16.1
  Top Layer w0.381: TP2.TP@11.2,11.712 TP2.TP 12.5,13 12.5,13.025 v1(12.525,13.05) ; SB1.2 16.3,20.2 19.153,17.347 19.153,16.085 IC1.6 ; v1(16.125,17.95) SB1.2@16.125,20.175
  Bottom Layer w0.381: v1(12.525,13.05) 16.125,16.65 v1(16.125,17.95)
NetIC1_8: IC1.8 SB2.2 TP1.TP | length 11.2
  Top Layer w0.381: TP1.TP 14.078,15.4 14.716,16.038 ; SB2.2 13.7,17.054 14.716,16.038 ; IC1.8 14.716,16.038
NetIC1_26: IC1.26 SB3.1 | length 5.8
  Top Layer w0.381: IC1.26 27,9.8 29.3,7.5 SB3.1
NetIC1_31: IC1.31 R2.2 | length 4.7
  Top Layer w0.381: IC1.31 29.1,13.8 R2.2
NetIC3_6: IC3.6 J2.1 | length 7.9
  Top Layer w0.5: v1(9.3,30) 9.315,29.985 IC3.6
  Bottom Layer w0.5: J2.1 6,26.7 v1(9.3,30)
NetIC3_8: IC3.8 J2.2 | length 7.4
  Top Layer w0.5: J2.2 7.7,23 10.825,26.125 IC3.8@10.825,27.45
NetLED1_1: LED1.1 R1.2 | length 2.3
  Top Layer w0.381: R1.2 31.125,9.425 31.125,11.675 LED1.1
NetR1_1: R1.1 SB3.2 | length 2.9
  Top Layer w0.381: R1.1 29.3,9.2 30.691,7.81 30.791,7.81 31.1,7.5 SB3.2
PWM_A: IC3.3 SB1.1 | length 14.3
  Top Layer w0.381: SB1.1 16.1,22.9 21.1,27.9 21.1,28.974 20.634,29.44 17.244,29.44 16.699,29.985 IC3.3
PWM_B: IC3.2 SB2.1 | length 8
  Top Layer w0.381: SB2.1 13.7,26.553 IC3.2@15.843,28.696 ; IC3.2@15.824,28.715 IC3.2
SWCLK: IC1.24 J1.3 | length 8.9
  Top Layer w0.381: IC1.24 25.688,7.562 J1.3
SWDIO: IC1.23 J1.2 | length 8.3
  Top Layer w0.381: IC1.23 22.4,5.725 23.187,4.938 25.772,4.938 J1.2
pads on no net: CN1.2 CN1.3 CN1.4 IC1.7 IC1.9 IC1.10 IC1.11 IC1.12 IC1.13 IC1.14 IC1.15 IC1.18 IC1.19 IC1.20 IC1.21 IC1.22 IC1.25 IC1.27 IC1.28 IC1.29 IC1.30 IC2.4 IC3.9 MH1.5 MH2.5 MH3.5 MH4.5

## Polygon pours and split planes (outlines as drawn)
GND on Bottom Layer "GND_L04_P019" (solid, pour order 19): 0,0 42.5,0 42.5,36 0,36
GND on Top Layer "GND_L01_P022" (solid, pour order 22): 0,0 42.5,0 42.5,36 0,36
no net on Top Solder "NONET_L-01_P-001" (solid): 24.75,31.55 25,31.55 25,30.7 24.75,30.7
no net on Top Solder "NONET_L-01_P-001" (solid): 28.2,31.575 28.45,31.575 28.45,30.725 28.2,30.725
no net on Top Solder "NONET_L-01_P-001" (solid): 25.6,31.95 25.6,30.35 25.65,30.35 25.65,31.95
no net on Top Solder "NONET_L-01_P-001" (solid): 26.25,31.95 26.25,30.35 26.3,30.35 26.3,31.95
no net on Top Solder "NONET_L-01_P-001" (solid): 26.9,31.95 26.9,30.35 26.95,30.35 26.95,31.95
no net on Top Solder "NONET_L-01_P-001" (solid): 27.55,31.95 27.55,30.35 27.6,30.35 27.6,31.95
3V3 on Int2 (PWR) (split plane): 38.749,35.483 38.997,35.456 39.242,35.412 39.484,35.35 39.72,35.272 39.95,35.176 40.173,35.065 40.388,34.937 40.592,34.795 40.787,34.639 40.969,34.469 41.139,34.287 41.295,34.092 41.437,33.888 41.565,33.673 41.676,33.45 41.772,33.22 41.85,32.984 41.912,32.742 41.956,32.497 41.983,32.249 41.991,32.016 41.99,32 41.99,4 41.991,3.984 41.983,3.751 41.956,3.503 41.912,3.258 41.85,3.016 41.772,2.78 41.676,2.55 41.565,2.327 41.437,2.112 41.295,1.908 41.139,1.713 40.969,1.531 40.787,1.361 40.592,1.205 40.388,1.063 40.173,0.935 39.95,0.824 39.72,0.728 39.484,0.65 39.242,0.588 38.997,0.544 38.749,0.517 38.516,0.509 38.5,0.51 4,0.51 3.984,0.509 3.751,0.517 3.503,0.544 3.258,0.588 3.016,0.65 2.78,0.728 2.55,0.824 2.327,0.935 2.112,1.063 1.908,1.205 1.713,1.361 1.531,1.531 1.361,1.713 1.205,1.908 1.063,2.112 0.935,2.327 0.824,2.55 0.728,2.78 0.65,3.016 0.588,3.258 0.544,3.503 0.517,3.751 0.509,3.984 0.51,4 0.51,32 0.509,32.016 0.517,32.249 0.544,32.497 0.588,32.742 0.65,32.984 0.728,33.22 0.824,33.45 0.935,33.673 1.063,33.888 1.205,34.092 1.361,34.287 1.531,34.469 1.713,34.639 1.908,34.795 2.112,34.937 2.327,35.065 2.55,35.176 2.78,35.272 3.016,35.35 3.258,35.412 3.503,35.456 3.751,35.483 3.984,35.491 4,35.49 38.5,35.49 38.516,35.491
GND on Int1 (GND) (split plane): 38.749,35.483 38.997,35.456 39.242,35.412 39.484,35.35 39.72,35.272 39.95,35.176 40.173,35.065 40.388,34.937 40.592,34.795 40.787,34.639 40.969,34.469 41.139,34.287 41.295,34.092 41.437,33.888 41.565,33.673 41.676,33.45 41.772,33.22 41.85,32.984 41.912,32.742 41.956,32.497 41.983,32.249 41.991,32.016 41.99,32 41.99,4 41.991,3.984 41.983,3.751 41.956,3.503 41.912,3.258 41.85,3.016 41.772,2.78 41.676,2.55 41.565,2.327 41.437,2.112 41.295,1.908 41.139,1.713 40.969,1.531 40.787,1.361 40.592,1.205 40.388,1.063 40.173,0.935 39.95,0.824 39.72,0.728 39.484,0.65 39.242,0.588 38.997,0.544 38.749,0.517 38.516,0.509 38.5,0.51 4,0.51 3.984,0.509 3.751,0.517 3.503,0.544 3.258,0.588 3.016,0.65 2.78,0.728 2.55,0.824 2.327,0.935 2.112,1.063 1.908,1.205 1.713,1.361 1.531,1.531 1.361,1.713 1.205,1.908 1.063,2.112 0.935,2.327 0.824,2.55 0.728,2.78 0.65,3.016 0.588,3.258 0.544,3.503 0.517,3.751 0.509,3.984 0.51,4 0.51,32 0.509,32.016 0.517,32.249 0.544,32.497 0.588,32.742 0.65,32.984 0.728,33.22 0.824,33.45 0.935,33.673 1.063,33.888 1.205,34.092 1.361,34.287 1.531,34.469 1.713,34.639 1.908,34.795 2.112,34.937 2.327,35.065 2.55,35.176 2.78,35.272 3.016,35.35 3.258,35.412 3.503,35.456 3.751,35.483 3.984,35.491 4,35.49 38.5,35.49 38.516,35.491

## Other copper
Bottom Layer:
  text "HappyDonuts" at 3.58,26.646 h1.7 r90

## Silkscreen, mask and mechanical layers (free items; w line width, h text height)
Top Overlay:
  text "DecoLED" at 9.353,33.053 h1.5
  text "rev 1.0" at 8.152,1.102 h1
Mechanical 13:
  the board outline again, w0